# Altium PCB Radar_1GHz.PcbDoc (part 2 of 2)
Units mil, origin at the board's own origin, x right, y up, seen from the top; angles counter-clockwise.
Board outline 4921.26 x 3149.61 mil, 4 copper layers (Top Layer - RF, Layer 1 - GND, Layer 2 - GND, Bottom Layer - PWR), stack 62.633 mil thick; 158 components, 76 nets, 413 pads, 246 vias.
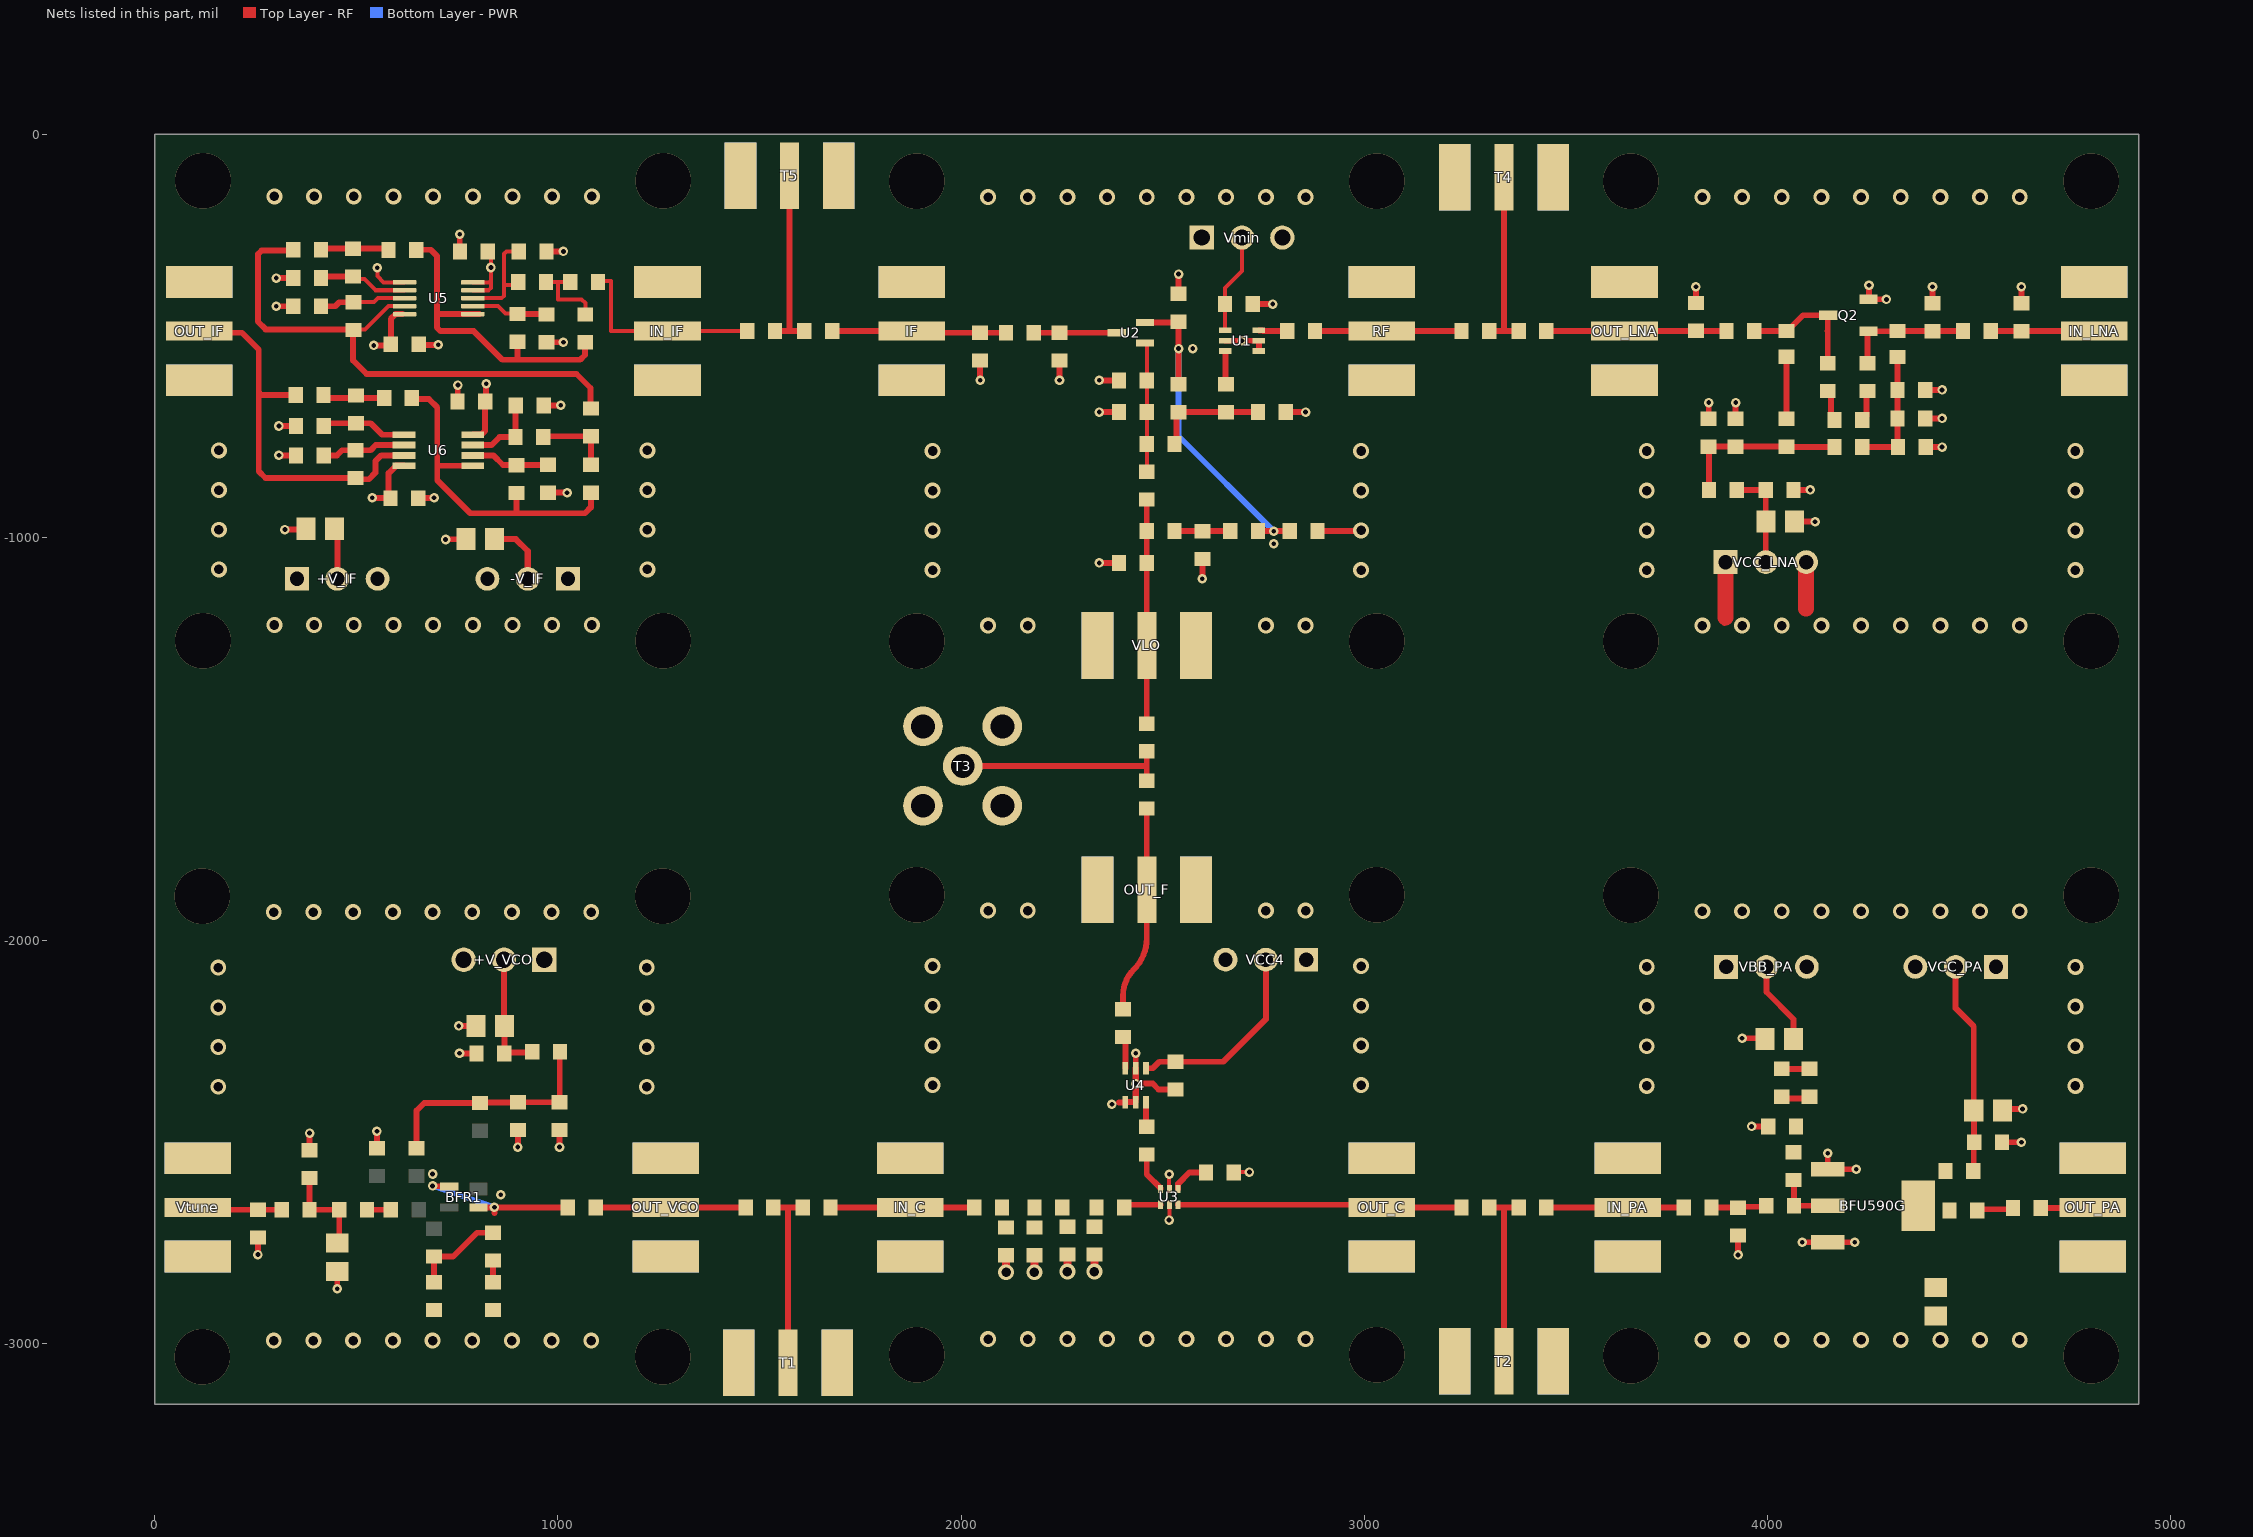
[diagram p4: the nets of this part, all layers, seen from the top]

## Via types
v1: diameter 39.37, hole 23.62, Top Layer - RF to Bottom Layer - PWR, tented both sides, 150 vias
v2: diameter 23.62, hole 11.81, Top Layer - RF to Bottom Layer - PWR, tented both sides, 72 vias
v3: diameter 137.8, hole 137.8, Top Layer - RF to Bottom Layer - PWR, 24 vias

## Nets (pads, with @x,y where several pads share a name; then routed paths per layer and width w, separated by ;. In a path a pad name is that pad's centre, name@x,y a point inside that pad or via, vN(x,y) a via of type N, cw(c..) or ccw(c..) an arc to the next point about the centre after c; other vN are vias at no path point) (continued)
GND: +V_IF.1 +V_IF.3 +V_VCO.01 +V_VCO.03 -V_IF.1 -V_IF.3 BFU590G.1 BFU590G.3 C1.1 C2.2 C3.2 C8.1 C9.1 C10.1 C11.1 C12.1 C13.1 C14.2 C15.1 C19.1 C20.1 C21.2 C22.2 C23.2 C24.2 C25.1 C28.1 C29.2 C30.2 C31.2 C32.2 C33.2 C34.1 C35.1 C40.1 C41.1 C42.1 C46.1 C47.1 C48.1 C51.2 C52.2 C53.1 C54.1 C55.1 C56.1 Cn1.1 Cn2.1 Cp1.1 Cp2.1 D1.1 IF.2 IN_C.2 IN_IF.2 IN_LNA.2 IN_PA.2 L4.2 L6.1 L7.1 L17.1 L18.1 OUT_C.2 OUT_F.2 OUT_IF.2 OUT_LNA.2 OUT_PA.2 OUT_VCO.2 Q2.2 R4.1 R6.1 R9.2 R13.1 R14.1 R16.1 R18.1 R20.1 RF.2 T1.2 T2.2 T3.2 T4.2 T5.2 U1.2 U1.4 U1.5 U3.2 U3.5 U4.2 U4.4 U4.5 VBB_PA.1 VBB_PA.3 VCC4.1 VCC4.3 VCC_LNA.1 VCC_LNA.3 VCC_PA.1 VCC_PA.3 VLO.2 Vmin.01 Vmin.03 Vtune.2 | length 3405.5
  Top Layer - RF w10: v2(2515.75,-2692.91) 2516.65,-2692.01 U3.2@2516.65,-2662.91 ; v2(2516.2,-2579.19) 2516.2,-2615.22 U3.5@2516.65,-2615.67 ; R13.1@2678.82,-2574.35 2714.84,-2574.35 v2(2715.3,-2573.9)
  Top Layer - RF w14.5: v2(255.91,-2778.54) C20.1@255.91,-2736.22 ; v2(301.14,-426.38) R16.1@343.46,-426.38 ; v2(301.14,-356.38) C54.1@343.46,-356.38 ; v2(308.07,-796.26) R20.1@350.39,-796.26 ; v2(308.07,-723.43) C56.1@350.39,-723.43 ; v2(322.83,-980.32) 373.03,-980.32 C51.2@375,-978.35 ; C21.2@383.86,-2519.69 v2(383.86,-2477.36) ; v2(452.76,-2863.19) D1.1@452.76,-2820.87 ; R4.1@551.18,-2514.76 v2(551.18,-2472.44) ; Cp1.1@653.54,-902.56 654.04,-902.07 692.42,-902.07 v2(692.91,-901.57) ; Cn2.1@654.53,-520.67 656,-522.15 v2(703.25,-522.15) ; v2(721.46,-1004.92) 721.95,-1004.43 771.16,-1004.43 C52.2@771.65,-1003.94 ; Cn1.1@750.98,-660.43 Cn1.1@750.98,-662.4 751.48,-661.91 751.48,-622.54 v2(751.97,-622.05) ; v2(753.94,-2211.61) C14.2@796.26,-2211.61 ; v2(755.91,-2279.53) C15.1@798.23,-2279.53 ; v2(756.4,-247.54) 756.64,-247.79 756.64,-289.62 756.4,-289.86 Cp2.1@756.89,-290.35 ; v2(900.59,-2511.81) C13.1@900.59,-2469.49 ; C55.1@964.57,-672.24 v2(1006.89,-672.24) ; R14.1@971.46,-515.75 v2(1013.78,-515.75) ; C53.1@971.46,-290.35 v2(1013.78,-290.35) ; R18.1@975.39,-888.78 v2(1022.64,-888.78) ; v2(1003.94,-2511.81) C12.1@1003.94,-2469.49 ; v2(2047.24,-610.24) C9.1@2047.24,-561.02 ; v2(2244.09,-610.24) C8.1@2244.09,-561.02 ; v2(2342.52,-1062.99) C10.1@2391.73,-1062.99 ; v2(2342.52,-688.98) C2.2@2391.73,-688.98 ; v2(2342.52,-610.24) L4.2@2391.73,-610.24 ; v2(2433.07,-2354.45) 2475.21,-2354.45 2489.85,-2369.09 C48.1@2531.5,-2369.09 ; U4.2@2433.07,-2316.27 v2(2433.07,-2279.53) ; L7.1@2539.37,-395.67 v2(2539.37,-346.46) ; v2(2598.43,-1102.36) L6.1@2598.43,-1053.15 ; U1.2@2654.85,-511.81 v2(2696.85,-511.81) U1.5@2738.85,-511.81 U1.4@2738.85,-537.4 ; C1.1@2723.75,-420.94 v2(2772.96,-420.94) ; C3.2@2805.12,-688.98 v2(2854.33,-688.98) ; C11.1@2883.86,-984.25 2990.16,-984.25 v1(2992.13,-982.28) ; C41.1@3822.83,-418.31 v2(3822.83,-377.95) ; C33.2@3854.33,-705.71 v2(3854.33,-665.35) ; 3893.7,-1212.6 3896.06,-1210.24 ; 3893.7,-1200.79 3896.06,-1198.43 ; C32.2@3921.26,-705.71 v2(3921.26,-665.35) ; v2(3927.17,-2779.53) C28.1@3927.17,-2731.3 ; v2(3937.01,-2242.13) 3992.13,-2242.13 C22.2@3994.09,-2244.09 ; v2(3960.63,-2460.63) C25.1@4001.97,-2460.63 ; C31.2@4064.96,-881.89 v2(4106.3,-881.89) ; C30.2@4066.93,-960.63 v2(4118.11,-960.63) ; v2(4086.61,-2748.03) v2(4216.54,-2748.03) ; 4096.06,-1176.77 4098.43,-1179.13 ; v2(4149.61,-2527.56) BFU590G.1@4149.61,-2566.93 v2(4220.47,-2566.93) ; v2(4251.97,-374.02) 4251.97,-407.64 Q2.2@4250.79,-408.82 4251.1,-409.13 4294.96,-409.13 v2(4295.28,-409.45) ; C35.1@4391.73,-704.72 v2(4433.07,-704.72) ; C34.1@4391.73,-633.86 v2(4433.07,-633.86) ; R9.2@4392.72,-775.59 v2(4433.07,-775.59) ; C40.1@4409.45,-419.29 v2(4409.45,-377.95) ; C24.2@4581.69,-2500 v2(4629.92,-2500) ; C23.2@4581.69,-2422.24 C23.2@4582.68,-2421.26 4586.61,-2417.32 v2(4632.87,-2417.32) ; C42.1@4629.92,-419.29 v2(4629.92,-377.95)
  Top Layer - RF w15.75: 2391.73,-2401.57 2407.48,-2401.57 2408.79,-2400.27 U4.5@2432.2,-2400.27 ; U4.5@2433.07,-2392.64 v2(2433.07,-2354.45) U4.2@2433.07,-2316.27
  Top Layer - RF w19.68: v1(2111.65,-2822.44) C46.1@2111.65,-2780.12 ; v1(2181.65,-2822.44) L17.1@2181.65,-2780.12 ; v1(2263.78,-2820.87) C47.1@2263.78,-2778.54 ; v1(2330.71,-2820.87) L18.1@2330.71,-2778.54
  Top Layer - RF w39.37: 3896.06,-1198.43 VCC_LNA.1@3896.06,-1061.02 ; 4096.06,-1176.77 VCC_LNA.3@4096.06,-1061.02
  other v1: 295.28,-2992.13 393.7,-2992.13 492.13,-2992.13 590.55,-2992.13 688.98,-2992.13 787.4,-2992.13 885.83,-2992.13 984.25,-2992.13 1082.68,-2992.13 3838.58,-2990.16 3937.01,-2990.16 4035.43,-2990.16 4133.86,-2990.16 4232.28,-2990.16 4330.71,-2990.16 4429.13,-2990.16 4527.56,-2990.16 4625.98,-2990.16 2066.93,-2988.19 2165.35,-2988.19 2263.78,-2988.19 2362.2,-2988.19 2460.63,-2988.19 2559.06,-2988.19 2657.48,-2988.19 2755.91,-2988.19 2854.33,-2988.19 157.48,-2362.2 1220.47,-2362.2 3700.79,-2360.24 4763.78,-2360.24 1929.13,-2358.27 2992.13,-2358.27 157.48,-2263.78 1220.47,-2263.78 3700.79,-2261.81 4763.78,-2261.81 1929.13,-2259.84 2992.13,-2259.84 157.48,-2165.35 1220.47,-2165.35 3700.79,-2163.39 4763.78,-2163.39 1929.13,-2161.42 2992.13,-2161.42 157.48,-2066.93 1220.47,-2066.93 3700.79,-2064.96 4763.78,-2064.96 1929.13,-2062.99 2992.13,-2062.99 295.28,-1929.13 393.7,-1929.13 492.13,-1929.13 590.55,-1929.13 688.98,-1929.13 787.4,-1929.13 885.83,-1929.13 984.25,-1929.13 1082.68,-1929.13 3838.58,-1927.17 3937.01,-1927.17 4035.43,-1927.17 4133.86,-1927.17 4232.28,-1927.17 4330.71,-1927.17 4429.13,-1927.17 4527.56,-1927.17 4625.98,-1927.17 2066.93,-1925.2 2165.35,-1925.2 2755.91,-1925.2 2854.33,-1925.2 2066.93,-1218.5 2165.35,-1218.5 2755.91,-1218.5 2854.33,-1218.5 3838.58,-1218.5 3937.01,-1218.5 4035.43,-1218.5 4133.86,-1218.5 4232.28,-1218.5 4330.71,-1218.5 4429.13,-1218.5 4527.56,-1218.5 4625.98,-1218.5 296.79,-1216.99 395.22,-1216.99 493.64,-1216.99 592.07,-1216.99 690.49,-1216.99 788.92,-1216.99 887.34,-1216.99 985.77,-1216.99 1084.2,-1216.99 1929.13,-1080.71 2992.13,-1080.71 3700.79,-1080.71 4763.78,-1080.71 159,-1079.2 1221.99,-1079.2 1929.13,-982.28 3700.79,-982.28 4763.78,-982.28 159,-980.77 1221.99,-980.77 1929.13,-883.86 2992.13,-883.86 3700.79,-883.86 4763.78,-883.86 159,-882.34 1221.99,-882.34 1929.13,-785.43 2992.13,-785.43 3700.79,-785.43 4763.78,-785.43 159,-783.92 1221.99,-783.92 2066.93,-155.51 2165.35,-155.51 2263.78,-155.51 2362.2,-155.51 2460.63,-155.51 2559.06,-155.51 2657.48,-155.51 2755.91,-155.51 2854.33,-155.51 3838.58,-155.51 3937.01,-155.51 4035.43,-155.51 4133.86,-155.51 4232.28,-155.51 4330.71,-155.51 4429.13,-155.51 4527.56,-155.51 4625.98,-155.51 296.79,-154 395.22,-154 493.64,-154 592.07,-154 690.49,-154 788.92,-154 887.34,-154 985.77,-154 1084.2,-154
  other v2: 858.27,-2629.92 688.98,-2578.74 2374.02,-2405.51 2775.59,-1015.75 2574.8,-531.5
  other v3: 118.11,-3031.5 1259.84,-3031.5 3661.42,-3029.53 4803.15,-3029.53 1889.76,-3027.56 3031.5,-3027.56 118.11,-1889.76 1259.84,-1889.76 3661.42,-1887.8 4803.15,-1887.8 1889.76,-1885.83 3031.5,-1885.83 1889.76,-1257.87 3031.5,-1257.87 3661.42,-1257.87 4803.15,-1257.87 119.63,-1256.36 1261.36,-1256.36 1889.76,-116.14 3031.5,-116.14 3661.42,-116.14 4803.15,-116.14 119.63,-114.63 1261.36,-114.63
Net+V_VCO_02: +V_VCO.02 C14.1 C15.2 R1.1 | length 303.2
  Top Layer - RF w14.5: +V_VCO.02@866.14,-2047.24 866.14,-2210.63 C14.1@867.13,-2211.61 C15.2@867.13,-2279.53 869.09,-2277.56 934.06,-2277.56 R1.1@936.02,-2275.59
NetBFR1_1: BFR1.1 BFR1.3 C17.1 C18.2 C19.2 L9.2 | length 685.1
  Top Layer - RF w14.5: v2(688.98,-2608.27) 689.96,-2609.25 729.33,-2609.25 BFR1.3@730.32,-2610.24 ; C19.2@692.91,-2847.44 C17.1@692.91,-2783.46 740.16,-2783.46 799.21,-2724.41 L9.2@838.58,-2724.41 ; BFR1.1@803.15,-2661.42 v2(842.52,-2661.42) ; 842.52,-2675.2 v2(842.52,-2661.42) ; C18.2@1016.73,-2653.54 C18.2@1024.61,-2661.42 v2(842.52,-2661.42)
  Bottom Layer - PWR w14.5: v2(688.98,-2608.27) v2(842.52,-2661.42)
NetBFU590G_2: BFU590G.2 L12.1 L14.2 | length 146.7
  Top Layer - RF w14.5: L12.1@4065.94,-2594.49 L14.2@4065.94,-2657.48 BFU590G.2@4149.61,-2657.48
NetBFU590G_4: BFU590G.4 C29.1 L11.1 L13.1
NetC1_2: C1.2 U1.1 Vmin.02 | length 247.7
  Top Layer - RF w10: U1.1@2654.85,-486.22 C1.2@2654.85,-420.94 2654.85,-380.58 2696.85,-338.58 Vmin.02@2696.85,-255.91
NetC3_1: C3.1 C5.2 L1.2 L3.2 | length 279.7
  Top Layer - RF w14.5: L1.2@2529.53,-767.72 2534.45,-762.8 2534.45,-693.9 L3.2@2539.37,-688.98 C5.2@2657.48,-688.98 C3.1@2736.22,-688.98
NetC4_1: C4.1 R32.1 RF.1 | length 363.2
  Top Layer - RF w14.5: C4.1@2877.95,-488.19 RF.1@3043.31,-488.19 R32.1@3241.14,-488.19
NetC4_2: C4.2 U1.6 | length 71
  Top Layer - RF w14.5: U1.6@2738.85,-486.22 2746.85,-486.22 2748.82,-488.19 C4.2@2809.06,-488.19
NetC5_1: C5.1 U1.3 | length 84.4
  Top Layer - RF w14.5: U1.3@2654.85,-537.4 2655.92,-537.4 2656.17,-537.65 2656.17,-618.76 C5.1@2657.48,-620.08
NetC6_1: C6.1 C10.2 L2.1 R34.2 VLO.1 | length 556.1
  Top Layer - RF w14.5: R34.2@2460.63,-1461.61 VLO.1@2460.63,-1267.72 C10.2@2460.63,-1062.99 C6.1@2460.63,-984.25 L2.1@2460.63,-905.51
NetC6_2: C6.2 C7.1 L6.2 | length 137.8
  Top Layer - RF w14.5: C6.2@2529.53,-984.25 L6.2@2598.43,-984.25 C7.1@2667.32,-984.25
NetC8_2: C8.2 L5.1 U2.3 | length 206.1
  Top Layer - RF w14.5: L5.1@2180.12,-492.13 C8.2@2244.09,-492.13 U2.3@2386.26,-492.13
NetC9_2: C9.2 IF.1 L5.2 R31.2 | length 432.7
  Top Layer - RF w14.5: R31.2@1680.12,-488.19 IF.1@1877.95,-488.19 1881.89,-492.13 C9.2@2047.24,-492.13 L5.2@2111.22,-492.13
NetC12_2: C12.2 C13.2 R1.2 R2.2 R3.2 | length 581.8
  Top Layer - RF w14.5: R3.2@649.61,-2514.76 649.61,-2421.26 668.31,-2402.56 R2.2@807.09,-2402.56 808.07,-2401.57 899.61,-2401.57 C13.2@900.59,-2400.59 C12.2@1003.94,-2400.59 1004.43,-2400.1 1004.43,-2276.08 R1.2@1004.92,-2275.59
NetC16_2: C16.2 L8.2 | length 59.1
  Top Layer - RF w14.5: L8.2@526.57,-2667.32 C16.2@585.63,-2667.32
NetC18_1: C18.1 OUT_VCO.1 R36.1 | length 372
  Top Layer - RF w14.5: C18.1@1093.5,-2661.42 OUT_VCO.1@1267.72,-2661.42 R36.1@1465.55,-2661.42
NetC20_2: C20.2 R5.2 Vtune.1 | length 211.1
  Top Layer - RF w14.5: Vtune.1@106.3,-2661.42 112.2,-2667.32 C20.2@255.91,-2667.32 R5.2@314.96,-2667.32
NetC21_1: C21.1 D1.2 L8.1 R5.1 | length 237.3
  Top Layer - RF w14.5: C21.1@383.86,-2588.58 R5.1@383.86,-2667.32 L8.1@457.68,-2667.32 457.68,-2745.08 D1.2@452.76,-2750
NetC22_1: C22.1 L10.2 R7.2 VBB_PA.2 | length 289.8
  Top Layer - RF w14.5: VBB_PA.2@3997.64,-2064.96 3997.64,-2127.56 4064.96,-2194.88 C22.1@4064.96,-2244.09 ; L10.2@4035.43,-2317.91 R7.2@4104.33,-2317.91 R7.2@4094.49,-2308.07
NetC23_1: C23.1 C24.1 L11.2 VCC_PA.2 | length 525.7
  Top Layer - RF w14.5: VCC_PA.2@4466.93,-2064.96 4466.93,-2167.72 4511.81,-2212.6 C23.1@4511.81,-2421.26 4512.8,-2422.24 C24.1@4512.8,-2500 4511.81,-2500.98 4511.81,-2569.88 L11.2@4510.83,-2570.87
NetC25_2: C25.2 L10.1 L12.2 R7.1 | length 51.3
  Top Layer - RF w14.5: L10.1@4035.43,-2386.81 4040.35,-2391.73 4084.65,-2391.73
NetC26_1: C26.1 L13.2 | length 91
  Top Layer - RF w14.5: L13.2@4520.67,-2669.29 4523.62,-2666.34 4606.3,-2666.34 C26.1@4609.25,-2663.39
NetC26_2: C26.2 OUT_PA.1 | length 129.8
  Top Layer - RF w14.5: C26.2@4678.15,-2663.39 4805.12,-2663.39 OUT_PA.1@4807.09,-2661.42
NetC27_1: C27.1 IN_PA.1 R39.2 | length 340.6
  Top Layer - RF w14.5: R39.2@3451.77,-2661.42 IN_PA.1@3653.54,-2661.42 C27.1@3792.32,-2661.42
NetC27_2: C27.2 C28.2 L14.1 | length 138.3
  Top Layer - RF w14.5: C27.2@3861.22,-2661.42 3861.71,-2661.91 3926.67,-2661.91 C28.2@3927.17,-2662.4 3929.63,-2659.94 3994.59,-2659.94 L14.1@3997.05,-2657.48
NetC30_1: C30.1 C31.1 R8.2 VCC_LNA.2 | length 251
  Top Layer - RF w14.5: R8.2@3924.21,-881.89 C31.1@3996.06,-881.89 C30.1@3996.06,-960.63 VCC_LNA.2@3996.06,-1061.02
NetC32_1: C32.1 C33.1 R8.1 R10.2 R11.2 | length 420.1
  Top Layer - RF w14.5: R8.1@3855.32,-881.89 3854.82,-881.4 3854.82,-775.1 C33.1@3854.33,-774.61 C32.1@3921.26,-774.61 R11.2@4047.24,-774.61 4047.74,-775.1 4165.85,-775.1 R10.2@4166.34,-775.59
NetC34_2: C34.2 C35.2 L16.2 R9.1 R10.1 | length 312.3
  Top Layer - RF w14.5: R10.1@4235.24,-775.59 R9.1@4323.82,-775.59 4322.83,-774.61 C35.2@4322.83,-704.72 C34.2@4322.83,-633.86 L16.2@4322.83,-552.28
NetC36_1: C36.1 C37.1 L15.1 Q2.3 | length 309.2
  Top Layer - RF w14.5: C37.1@3967.52,-488.19 3967.8,-487.91 4046.97,-487.91 L15.1@4047.24,-487.64 4049.8,-487.64 4060.07,-477.37 4060.07,-476.88 4088.13,-448.82 Q2.3@4150.79,-448.82 ; Q2.3@4148.03,-452.13 4149.61,-453.7 4149.61,-488.19 ; 4149.06,-487.64 4149.61,-488.19 ; C36.1@4149.61,-560.04 4149.61,-488.19
NetC36_2: C36.2 R12.2 | length 86.7
  Top Layer - RF w14.5: C36.2@4149.61,-628.94 4157.48,-636.81 4157.48,-699.8 R12.2@4166.34,-708.66
NetC37_2: C37.2 C41.2 OUT_LNA.1 R33.2 | length 446.9
  Top Layer - RF w14.5: R33.2@3451.77,-488.19 OUT_LNA.1@3645.67,-488.19 C37.2@3898.62,-488.19
NetC38_1: C38.1 C39.2 C40.2 L16.1 Q2.1 | length 315.4
  Top Layer - RF w14.5: C38.1@4248.03,-567.91 4248.03,-491.57 Q2.1@4250.79,-488.82 4251.1,-488.5 4322.52,-488.5 L16.1@4322.83,-488.19 C40.2@4409.45,-488.19 C39.2@4485.24,-488.19 C39.2@4484.92,-488.5
NetC38_2: C38.2 R12.1 | length 77.2
  Top Layer - RF w14.5: R12.1@4235.24,-708.66 4245.7,-698.2 4245.7,-639.14 C38.2@4248.03,-636.81
NetC39_1: C39.1 C42.2 IN_LNA.1 | length 256.9
  Top Layer - RF w14.5: C39.1@4554.13,-488.19 C42.2@4629.92,-488.19 IN_LNA.1@4811.02,-488.19
NetC43_1: C43.1 IN_C.1 R37.2 | length 356.3
  Top Layer - RF w14.5: R37.2@1676.18,-2661.42 IN_C.1@1874.02,-2661.42 C43.1@2032.48,-2661.42
NetC43_2: C43.2 C44.1 C46.2 L17.2
NetC44_2: C44.2 C45.1 C47.2 L18.2
NetC45_2: C45.2 U3.1 | length 93.1
  Top Layer - RF w14.5: C45.2@2404.53,-2661.42 2410.91,-2655.04 U3.1@2495,-2655.04
NetC48_2: C48.2 U4.1 VCC4.2 | length 495.2
  Top Layer - RF w14.5: U4.1@2458.66,-2316.27 2475.66,-2316.27 2491.73,-2300.2 C48.2@2531.5,-2300.2 2650.59,-2300.2 2755.91,-2194.88 VCC4.2@2755.91,-2047.24
NetC49_1: C49.1 U3.6 | length 99.4
  Top Layer - RF w14.5: C49.1@2460.63,-2530.51 2460.63,-2579.8 2495,-2614.17 U3.6@2495,-2615.67
NetC49_2: C49.2 U4.6 | length 62.2
  Top Layer - RF w14.5: U4.6@2458.66,-2400.27 2458.91,-2400.52 2458.91,-2459.9 C49.2@2460.63,-2461.61
NetC50_1: C50.1 U4.3 | length 78.6
  Top Layer - RF w14.5: C50.1@2401.57,-2239.17 2407.48,-2249.64 U4.3@2407.48,-2316.27
NetC50_2: C50.2 OUT_F.1 R35.1 | length 513.8
  Top Layer - RF w14.5: C50.2@2401.57,-2170.28 2401.57,-2159.81 2401.57,-2136.36 cw(c2493.36,-2136.44) 2428.45,-2071.55 ccw(c2350.91,-1993.92) 2460.63,-1993.92 2460.63,-1993.85 OUT_F.1@2460.63,-1874.02 R35.1@2460.63,-1672.24
NetC53_2: C53.2 R23.2 U5.3 | length 261.2
  Top Layer - RF w10: U5.3@788.98,-406.38 860.28,-406.38 866.14,-400.52 866.14,-373.43 ; R23.2@901.57,-366.14 894.29,-373.43 866.14,-373.43 ; C53.2@902.56,-290.35 872,-290.35 866.14,-296.21 866.14,-373.43
NetC54_2: C54.2 R25.2 U5.7 | length 223.2
  Top Layer - RF w10: R25.2@492.13,-352.36 498.03,-358.27 519.69,-358.27 548.11,-386.69 U5.7@619.69,-386.69
  Top Layer - RF w14.5: C54.2@412.36,-356.38 416.38,-352.36 R25.2@492.13,-352.36
NetC55_2: C55.2 R27.2 U6.3 | length 192.7
  Top Layer - RF w14.5: U6.3@789.24,-770.67 835.63,-770.67 855.32,-750.98 R27.2@894.69,-750.98 894.69,-673.23 C55.2@895.67,-672.24
NetC56_2: C56.2 R29.2 U6.5 | length 213.6
  Top Layer - RF w14.5: C56.2@419.29,-723.43 426.18,-716.54 R29.2@499.02,-716.54 535.43,-716.54 563.98,-745.08 U6.5@618.24,-745.08
NetC57_1: C57.1 R15.2 R24.1 U5.1 | length 823.5
  Top Layer - RF w14.5: R24.1@648.62,-286.42 684.68,-286.38 699.69,-301.38 699.69,-444.88 ; U5.1@805.24,-446.26 804.72,-445.75 U5.1@788.98,-445.75 700.55,-445.75 699.69,-444.88 ; R15.2@899.61,-514.76 899.61,-557.09 901.57,-559.06 ; C57.1@1067.91,-515.75 1066.93,-516.73 1066.93,-547.24 1055.12,-559.06 901.57,-559.06 ; 699.69,-444.88 699.69,-479.21 708.66,-488.19 791.34,-488.19 862.2,-559.06 901.57,-559.06
NetC57_2: C57.2 R22.2 R23.1 | length 203.5
  Top Layer - RF w10: R23.1@970.47,-366.14 1000,-366.14 ; R22.2@1030.51,-366.14 1000,-366.14 ; C57.2@1067.91,-446.85 1067.91,-418.31 1059.06,-409.45 1000,-409.45 1000,-366.14
NetC58_1: C58.1 R17.2 R26.1 U5.9 | length 1379.6
  Top Layer - RF w10: R17.2@493.11,-485.24 494.26,-484.09 521.94,-484.09 579.96,-426.06 U5.9@619.69,-426.06
  Top Layer - RF w14.5: 323.78,-287.97 265.13,-287.97 255.91,-297.2 255.91,-464.57 275.1,-483.76 491.63,-483.76 491.63,-560.53 525.59,-594.49 1046.26,-594.49 1080.71,-628.94 1080.71,-679.13 R26.1@1081.69,-680.12
NetC58_2: C58.2 R24.2 R25.1 | length 169.8
  Top Layer - RF w14.5: C58.2@412.36,-286.38 415.28,-283.46 576.77,-283.46 R24.2@579.72,-286.42
NetC59_1: C59.1 R19.2 R28.1 U6.1 | length 866.7
  Top Layer - RF w14.5: R28.1@641.73,-656.26 679.88,-656.26 700.79,-677.17 700.79,-818.9 ; U6.1@809.67,-822.48 789.87,-822.48 U6.1@789.24,-821.85 703.74,-821.85 700.79,-818.9 ; R19.2@897.64,-889.76 897.64,-939.96 ; C59.1@1081.69,-888.78 1081.69,-925.2 1066.93,-939.96 897.64,-939.96 ; 700.79,-818.9 700.79,-858.27 782.48,-939.96 897.64,-939.96
NetC59_2: C59.2 R26.2 R27.1 | length 189.8
  Top Layer - RF w14.5: R27.1@963.58,-750.98 965.55,-749.02 R26.2@1081.69,-749.02 C59.2@1081.69,-819.88
NetC60_1: C60.1 OUT_IF.1 R21.2 U6.7 | length 960.4
  Top Layer - RF w14.5: OUT_IF.1@122.05,-486.22 127.95,-492.13 216.54,-492.13 257.87,-533.46 257.87,-639.76 ; C60.1@349.41,-646.65 264.76,-646.65 257.87,-639.76 ; R21.2@482.28,-855.31 531.5,-855.31 547.24,-839.57 547.24,-811.02 562.01,-796.26 U6.7@618.24,-796.26 ; R21.2@482.28,-852.36 274.61,-852.36 257.87,-835.63 257.87,-646.65 257.87,-639.76
NetC60_2: C60.2 R28.2 R29.1 | length 159.4
  Top Layer - RF w14.5: C60.2@409.45,-653.54 R28.2@568.9,-653.54
NetIN_IF_1: IN_IF.1 R22.1 R30.1 | length 494.2
  Top Layer - RF w10: R22.1@1099.41,-366.14 1112.13,-364.17 1131.89,-364.17 1131.89,-488.19 IN_IF.1@1271.65,-488.19 R30.1@1469.49,-488.19
NetL9_1: L9.1 R6.2 | length 54.1
  Top Layer - RF w14.5: R6.2@838.58,-2847.44 L9.1@838.58,-2793.31
NetL15_2: L15.2 R11.1 | length 154
  Top Layer - RF w14.5: R11.1@4047.24,-705.71 L15.2@4047.24,-551.73
NetOUT_C_1: OUT_C.1 R38.1 U3.3 | length 705.5
  Top Layer - RF w14.5: U3.3@2538.31,-2655.04 3036.93,-2655.04 OUT_C.1@3043.31,-2661.42 R38.1@3241.14,-2661.42
NetR13_2: R13.2 U3.4 | length 93.5
  Top Layer - RF w14.5: U3.4@2538.31,-2615.67 2538.31,-2602.77 2566.28,-2574.8 R13.2@2607.28,-2574.8
NetR14_2: R14.2 R15.1 U5.2 | length 191.1
  Top Layer - RF w10: U5.2@788.98,-426.06 851.26,-426.06 870.08,-444.88 898.62,-444.88 R15.1@899.61,-445.87
  Top Layer - RF w14.5: R15.1@899.61,-445.87 970.47,-445.87 R14.2@971.46,-446.85
NetR16_2: R16.2 R17.1 U5.8 | length 215.6
  Top Layer - RF w10: R17.1@493.11,-416.34 544.29,-416.34 554.25,-406.38 U5.8@619.69,-406.38
  Top Layer - RF w14.5: R16.2@412.36,-426.38 447.64,-426.38 457.68,-416.34 R17.1@493.11,-416.34
NetR18_2: R18.2 R19.1 U6.2 | length 196.8
  Top Layer - RF w14.5: U6.2@789.24,-796.26 839.57,-796.26 863.56,-820.25 897.02,-820.25 R19.1@897.64,-820.87 898.62,-819.88 R18.2@975.39,-819.88
NetR20_2: R20.2 R21.1 U6.6 | length 209.5
  Top Layer - RF w14.5: R20.2@419.29,-796.26 451.77,-796.26 464.57,-783.46 R21.1@498.03,-783.46 535.43,-783.46 548.23,-770.67 U6.6@618.24,-770.67
NetR30_2: R30.2 R31.1 T5.1 | length 458.7
  Top Layer - RF w14.5: R30.2@1538.39,-488.19 1574.8,-488.19 ; T5.1@1574.8,-102.36 1574.8,-488.19 ; R31.1@1611.22,-488.19 1574.8,-488.19
NetR32_2: R32.2 R33.1 T4.1 | length 454.7
  Top Layer - RF w14.5: R32.2@3310.04,-488.19 3346.46,-488.19 ; T4.1@3346.46,-106.3 3346.46,-488.19 ; R33.1@3382.87,-488.19 3346.46,-488.19
NetR34_1: R34.1 R35.2 T3.1 | length 529.5
  Top Layer - RF w14.5: T3.1@2003.94,-1566.93 2460.63,-1566.93 ; R35.2@2460.63,-1603.35 2460.63,-1566.93 ; R34.1@2460.63,-1530.51 2460.63,-1566.93
NetR36_2: R36.2 R37.1 T1.1 | length 458.7
  Top Layer - RF w14.5: R36.2@1534.45,-2661.42 1570.87,-2661.42 ; T1.1@1570.87,-3047.24 1570.87,-2661.42 ; R37.1@1607.28,-2661.42 1570.87,-2661.42
NetR38_2: R38.2 R39.1 T2.1 | length 454.7
  Top Layer - RF w14.5: R38.2@3310.04,-2661.42 3346.46,-2661.42 ; T2.1@3346.46,-3043.31 3346.46,-2661.42 ; R39.1@3382.87,-2661.42 3346.46,-2661.42
p3: C2.1 L1.1 L2.2 L4.1 U2.1 | length 320.9
  Top Layer - RF w10: U2.1@2456.26,-517.72 2456.63,-517.72 2460.63,-521.72 L4.1@2460.63,-610.24 C2.1@2460.63,-688.98 L1.1@2460.63,-767.72 L2.2@2460.63,-836.61
p4: C7.2 C11.2 L3.1 L7.2 U2.2 | length 868.8
  Top Layer - RF w14.5: U2.2@2456.26,-466.54 2537.4,-466.54 L7.2@2539.37,-464.57 v2(2539.37,-531.5) L3.1@2539.37,-620.08 ; C7.2@2736.22,-984.25 v2(2775.59,-984.25) C11.2@2814.96,-984.25
  Bottom Layer - PWR w14.5: v2(2539.37,-531.5) 2539.37,-748.03 v2(2775.59,-984.25)
V+: +V_IF.2 C51.1 Cp1.2 Cp2.2 U5.4 U5.5 U5.6 U6.8 | length 556.3
  Top Layer - RF w10: v2(552.17,-330.71) 552.17,-351.38 567.8,-367.01 U5.6@619.69,-367.01 ; U5.4@788.98,-386.69 827.92,-386.69 833.78,-380.83 833.78,-362.2 ; U5.5@788.98,-367.01 828.98,-367.01 833.78,-362.2 ; Cp2.2@825.79,-290.35 833.78,-298.35 833.78,-362.2
  Top Layer - RF w15: C51.1@445.87,-978.35 453.74,-986.22 453.74,-1101.38 +V_IF.2@452.76,-1102.36 ; v2(539.37,-901.57) 539.86,-902.07 576.33,-902.07 580.24,-898.15 580.24,-840.35 598.74,-821.85 U6.8@618.24,-821.85
  other v2: 833.78,-330.28
V-: -V_IF.2 C52.1 Cn1.2 Cn2.2 U5.10 U6.4 | length 461.3
  Top Layer - RF w10: Cn2.2@582.68,-523.62 Cn2.2@585.63,-520.67 ; U5.10@597.13,-446.26 U5.10@597.64,-445.75 ; U5.10@614.17,-445.75 U5.10@619.69,-445.75
  Top Layer - RF w15: v2(543.31,-523.62) Cn2.2@582.68,-523.62 ; Cn2.2@585.63,-520.67 585.63,-457.76 U5.10@597.13,-446.26 ; U5.10@597.64,-445.75 U5.10@614.17,-445.75 ; U6.4@789.24,-745.08 790.24,-744.08 810.87,-744.08 819.66,-735.29 Cn1.2@819.66,-662.62 ; Cn1.2@819.88,-662.4 821.14,-661.14 821.14,-619.81 v2(822.4,-618.55) ; C52.1@842.52,-1003.94 895.67,-1003.94 925.2,-1033.46 -V_IF.2@925.2,-1102.36

## Polygon pours and split planes (outlines as drawn)
GND on Bottom Layer - PWR "GND_L04_P018" (solid, pour order 18): 1790.94,-3126.38 1790.94,-1787.8 3129.53,-1787.8 3129.53,-3126.38
GND on Bottom Layer - PWR "GND_L04_P004" (solid, pour order 4): 19.69,-3129.92 19.69,-1791.34 1358.27,-1791.34 1358.27,-3129.92
GND on Bottom Layer - PWR "GND_L04_P003" (solid, pour order 3): 3130.32,-17.32 3130.32,-1355.91 1791.73,-1355.91 1791.73,-17.32
GND on Bottom Layer - PWR "GND_L04_P019" (solid, pour order 19): 1362.2,-14.76 1362.2,-1353.35 23.62,-1353.35 23.62,-14.76
V+ on Bottom Layer - PWR "V+_sallen" (solid, pour order 0): 403.54,-1141.73 501.97,-1141.73 501.97,-1053.15 551.18,-1003.94 551.18,-669.29 495.57,-613.68 495.57,-348.92 507.01,-337.48 905.51,-337.48 905.51,-206.69 885.83,-187.01 452.76,-187.01 403.54,-248.52
V- on Bottom Layer - PWR "V-_sallen" (solid, pour order 1): 561.61,-669.29 841.34,-669.29 872.44,-700.39 872.44,-1141.73 974.41,-1141.73 974.41,-620.08 856.3,-501.97 511.81,-501.97 501.97,-511.81 501.97,-609.65
GND on Bottom Layer - PWR "NONET_L-01_P-001" (solid, pour order 22): 4901.58,-1344.49 3574.8,-1344.49 3574.8,-19.69 3110.24,-19.69 3110.24,-1348.43 2342.52,-1348.43 2342.52,-1805.12 3118.11,-1805.12 3118.11,-3125.98 3574.8,-3125.98 3574.8,-1809.06 4901.58,-1809.06
GND on Bottom Layer - PWR "NONET_L-01_P-001" (solid, pour order 21): 19.69,-1803.15 1346.46,-1803.15 1346.46,-3125.98 1811.02,-3125.98 1811.02,-1799.21 2574.8,-1799.21 2574.8,-1342.52 1803.15,-1342.52 1803.15,-15.75 1346.46,-15.75 1346.46,-1338.58 19.69,-1338.58
GND on Bottom Layer - PWR "GND_L04_P006" (solid, pour order 6): 4901.57,-17.72 4901.57,-1356.3 3562.99,-1356.3 3562.99,-17.72
GND on Bottom Layer - PWR "GND_L04_P005" (solid, pour order 5): 3562.99,-3127.95 3562.99,-1789.37 4901.58,-1789.37 4901.58,-3127.95
GND on Top Layer - RF "NONET_L-01_P-001" (solid, pour order 8): 2322.83,-1653.54 2027.56,-1653.54 2027.56,-1486.22 2322.83,-1486.22 2322.83,-1342.52 1803.15,-1342.52 1803.15,-625.98 1346.46,-625.98 1346.46,-1338.58 19.69,-1338.58 19.69,-1803.15 1346.46,-1803.15 1346.46,-2527.56 1811.02,-2527.56 1811.02,-1799.21 2322.83,-1799.21
GND on Top Layer - RF "NONET_L-01_P-001" (solid, pour order 11): 4901.58,-1344.49 3574.8,-1344.49 3574.8,-620.08 3110.24,-620.08 3110.24,-1348.43 2590.55,-1348.43 2590.55,-1805.12 3118.11,-1805.12 3118.11,-2521.65 3574.8,-2521.65 3574.8,-1809.06 4901.58,-1809.06
GND on Layer 2 - GND (split plane): 4901.16,-3129.51 20.1,-3129.51 20.1,-20.1 4901.16,-20.1
GND on Layer 1 - GND (split plane): 4901.16,-3129.51 20.1,-3129.51 20.1,-20.1 4901.16,-20.1

## Other copper
Top Layer - RF:
  region net GND: 3129.92,-2793.31 1791.34,-2793.31 1791.34,-3125.98 3129.92,-3125.98
  region net GND: 4901.58,-610.24 4696.85,-610.24 4696.85,-1356.3 4901.58,-1356.3
  rectangle net NetC22_1: 4054.8,-2322.83 4084.33,-2224.09
  rectangle net NetC25_2: 4055.12,-2529.53 4084.65,-2391.73
  rectangle net NetBFU590G_4: 4360.24,-2856.3 4466.54,-2551.18
  region net GND: 4079.92,-1914.37 4079.92,-2067.91 4119.29,-2067.91 4119.29,-1914.37
  region net GND: 2433.07,-2377.95 2350.39,-2377.95 2350.39,-2425.2 2433.07,-2425.2
  rectangle net NetBFR1_1: 826.77,-2708.66 858.27,-2649.61
  rectangle net GND: 3562.99,-214.57 4901.57,-17.72
  region net GND: 4549.21,-1926.18 4549.21,-2079.72 4588.58,-2079.72 4588.58,-1926.18
  region net GND: 4348.43,-1914.37 4348.43,-2067.91 4387.8,-2067.91 4387.8,-1914.37
  region net GND: 3879.92,-1914.37 3879.92,-2067.91 3919.29,-2067.91 3919.29,-1914.37
  region net GND: 3574.8,-2960.63 3468.5,-2960.63 3468.5,-3125.98 3574.8,-3125.98
  rectangle net GND: 3118.11,-3125.98 3224.41,-2960.63
  region net GND: 3566.93,-23.62 3460.63,-23.62 3460.63,-188.98 3566.93,-188.98
  rectangle net GND: 3118.11,-188.98 3224.41,-23.62
  region net GND: 1803.15,-19.69 1696.85,-19.69 1696.85,-185.04 1803.15,-185.04
  rectangle net GND: 1346.46,-185.04 1452.76,-19.69
  region net GND: 1799.21,-2964.57 1692.91,-2964.57 1692.91,-3129.92 1799.21,-3129.92
  rectangle net GND: 1342.52,-3129.92 1448.82,-2964.57
  region net GND: 3129.92,-610.24 2928.15,-610.24 2928.15,-1356.3 3129.92,-1356.3
  region net GND: 3129.92,-1159.45 2586.61,-1159.45 2586.61,-1356.3 3129.92,-1356.3
  rectangle net GND: 1791.34,-366.14 1996.06,-17.72
  rectangle net GND: 2928.15,-366.14 3129.92,-17.72
  rectangle net GND: 1794.29,-201.77 3129.92,-17.72
  region net GND: 2329.53,-1159.45 1791.34,-1159.45 1791.34,-1356.3 2329.53,-1356.3
  region net GND: 1993.11,-610.24 1791.34,-610.24 1791.34,-1356.3 1993.11,-1356.3
  rectangle net GND: 3562.99,-366.14 3766.73,-17.72
  rectangle net GND: 4693.9,-366.14 4901.58,-17.72
  region net GND: 4901.58,-1159.45 3562.99,-1159.45 3562.99,-1356.3 4901.58,-1356.3
  region net GND: 3760.83,-610.24 3562.99,-610.24 3562.99,-1356.3 3760.83,-1356.3
  region net GND: 1359.79,-1157.94 21.2,-1157.94 21.2,-1354.79 1359.79,-1354.79
  region net GND: 1359.79,-610.24 1156.5,-610.24 1156.5,-1354.79 1359.79,-1354.79
  rectangle net GND: 21.2,-204.72 1359.79,-16.2
  rectangle net GND: 1157.48,-366.14 1359.79,-16.2
  rectangle net GND: 21.2,-377.95 222.44,-16.2
  region net GND: 222.44,-622.05 21.2,-622.05 21.2,-1354.79 222.44,-1354.79
  rectangle net GND: 4702.76,-2539.37 4901.58,-1789.37
  rectangle net GND: 3562.99,-1986.22 4901.58,-1789.37
  region net GND: 3759.84,-2783.46 3562.99,-2783.46 3562.99,-3127.95 3759.84,-3127.95
  rectangle net GND: 3562.99,-2539.37 3759.84,-1789.37
  region net GND: 4901.58,-2931.1 3562.99,-2931.1 3562.99,-3127.95 4901.58,-3127.95
  region net GND: 4901.58,-2787.4 4702.76,-2787.4 4702.76,-3127.95 4901.58,-3127.95
  region net GND: 3129.92,-2771.65 2933.07,-2771.65 2933.07,-3125.98 3129.92,-3125.98
  region net GND: 1988.19,-2771.65 1791.34,-2771.65 1791.34,-3125.98 1988.19,-3125.98
  rectangle net GND: 1791.34,-1984.25 2346.46,-1787.4
  rectangle net GND: 2922.24,-2543.31 3129.92,-1787.4
  rectangle net GND: 1791.34,-2527.56 1995.08,-1787.4
  region net GND: 3129.92,-1787.4 2582.68,-1787.4 2582.68,-1984.25 3129.92,-1984.25
  rectangle net NetC43_2: 2090.55,-2724.41 2200.79,-2641.73
  rectangle net NetC44_2: 2240.28,-2721.54 2350.51,-2638.86
  rectangle net GND: 19.69,-2527.56 222.44,-1791.34
  rectangle net GND: 1156.5,-2539.37 1358.27,-1791.34
  rectangle net GND: 19.69,-1988.19 1358.27,-1791.34
  region net GND: 1358.27,-2933.07 19.69,-2933.07 19.69,-3129.92 1358.27,-3129.92
  region net GND: 222.44,-2783.46 19.69,-2783.46 19.69,-3129.92 222.44,-3129.92
  region net GND: 1358.27,-2783.46 1161.42,-2783.46 1161.42,-3129.92 1358.27,-3129.92
Bottom Layer - PWR:
  pour cut-out: 858.27,-870.08 858.27,-677.17 554.13,-677.17 554.13,-881.89 870.08,-881.89
  pour cut-out: 870.67,-496.56 870.67,-338.58 507.87,-338.58 507.87,-496.56
Layer 1 - GND (plane layer: these items are gaps in the copper):
  pour cut-out: 873.03,-489.17 873.03,-317.91 507.87,-317.91 507.87,-489.17
  pour cut-out: 868.11,-879.92 868.11,-685.04 554.13,-685.04 554.13,-881.89 870.08,-881.89
Layer 2 - GND (plane layer: these items are gaps in the copper):
  pour cut-out: 868.11,-879.92 868.11,-685.04 554.13,-685.04 554.13,-881.89 870.08,-881.89
  pour cut-out: 873.03,-489.17 873.03,-317.91 507.87,-317.91 507.87,-489.17

## Silkscreen, mask and mechanical layers (free items; w line width, h text height)
Top Overlay:
  drawing of 134 lines, arcs and shapes, not listed
  text "FI" at 600.39,-160.98 h157.48
  text "OUT" at 185.04,-222.22 h78.74
  text "IN" at 1122.05,-222.22 h78.74
  text "MIXER" at 2047.24,-338.14 h157.48
  text "OUT" at 3807.09,-611.98 h78.74
  text "IF" at 2007.87,-789.15 h78.74
  text "RF" at 2854.33,-789.15 h78.74
  text "IN" at 4606.3,-797.02 h78.74
  text "LNA" at 4452.76,-999.56 h157.48
  text "LO" at 2135.83,-1143.48 h78.74
  text "MON" at 2096.46,-2039.15 h78.74
  text "VCO" at 255.91,-2109.79 h157.48
  text "PA" at 4433.07,-2310.58 h157.48
  text "IN" at 3787.4,-2399.39 h78.74
  text "IN" at 1998.03,-2403.32 h78.74
  text "OUT" at 2805.12,-2403.32 h78.74
  text "COUPLER" at 2411.42,-2808.61 h157.48
  text "OUT" at 4576.77,-2846.24 h78.74
  text "VTUNE" at 236.22,-2914.77 h78.74
  text "OUT" at 1043.31,-2915.13 h78.74
Bottom Overlay:
  drawing of 54 lines, arcs and shapes, not listed
Board Shape:
  the board outline again, w10
V Cut:
  lines w19.68: 0,-1769.69 4921.26,-1769.69 ; 3.94,-1375.98 4921.26,-1375.98 ; 1377.95,-3149.61 1377.95,0 ; 1771.65,-3149.61 1771.65,0 ; 3149.61,-3149.61 3149.61,0 ; 3543.31,-3149.61 3543.31,0
Dimensions:
  drawing of 217 lines, arcs and shapes, not listed
  text "Layer" at 6102.13,438.5 h60
  text "Name" at 6512.04,438.5 h60
  text "Material" at 7841.65,438.5 h60
  text "Thickness" at 8501.49,438.5 h60
  text "Constant" at 9151.32,438.5 h60
  text "Top Overlay" at 6512.04,318.5 h60
  text "Top Solder" at 6512.04,198.5 h60
  text "SM-001" at 7841.65,198.5 h60
  text "0,025mm" at 8501.49,198.5 h60
  text "4" at 9151.32,198.5 h60
  text "Top Surface Finish" at 6512.04,78.5 h60
  text "Lead-Free" at 7841.65,78.5 h60
  text "0,020mm" at 8501.49,78.5 h60
  text "1" at 6102.13,-41.5 h60
  text "Top Layer - RF" at 6512.04,-41.5 h60
  text "Copper" at 7841.65,-41.5 h60
  text "0,035mm" at 8501.49,-41.5 h60
  text "Prepeg 1" at 6512.04,-161.5 h60
  text "PP-006" at 7841.65,-161.5 h60
  text "0,210mm" at 8501.49,-161.5 h60
  text "4.4" at 9151.32,-161.5 h60
  text "2" at 6102.13,-281.5 h60
  text "Layer 1 - GND" at 6512.04,-281.5 h60
  text "CF-004" at 7841.65,-281.5 h60
  text "0,018mm" at 8501.49,-281.5 h60
  text "Dielectric 1" at 6512.04,-401.5 h60
  text "FR4" at 7841.65,-401.5 h60
  text "1,065mm" at 8501.49,-401.5 h60
  text "4.6" at 9151.32,-401.5 h60
  text "3" at 6102.13,-521.5 h60
  text "Layer 2 - GND" at 6512.04,-521.5 h60
  text "CF-004" at 7841.65,-521.5 h60
  text "0,018mm" at 8501.49,-521.5 h60
  text "Prepeg 2" at 6512.04,-641.5 h60
  text "PP-006" at 7841.65,-641.5 h60
  text "0,210mm" at 8501.49,-641.5 h60
  text "4.4" at 9151.32,-641.5 h60
  text "4" at 6102.13,-761.5 h60
  text "Bottom Layer - PWR" at 6512.04,-761.5 h60
  text "Copper" at 7841.65,-761.5 h60
  text "0,035mm" at 8501.49,-761.5 h60
  text "Bottom Surface Finish" at 6512.04,-881.5 h60
  text "Lead-Free" at 7841.65,-881.5 h60
  text "0,020mm" at 8501.49,-881.5 h60
  text "Bottom Solder" at 6512.04,-1001.5 h60
  text "SM-001" at 7841.65,-1001.5 h60
  text "0,025mm" at 8501.49,-1001.5 h60
  text "4" at 9151.32,-1001.5 h60
  text "Bottom Overlay" at 6512.04,-1121.5 h60

## Dimensions
4921.26,1.97 to 4921.26,-3147.64 on Mechanical 16
0,-3149.61 to 4921.26,-3149.61 on Mechanical 16

## Text inside footprints (layer, text, board x,y; h text height)
IF: Mechanical 13 "PCB EDGE" at 1787.95,-748.19 h24
IN_C: Mechanical 13 "PCB EDGE" at 1784.02,-2921.42 h24
IN_IF: Mechanical 13 "PCB EDGE" at 1361.65,-228.19 h24 r180
IN_LNA: Mechanical 13 "PCB EDGE" at 4901.02,-228.19 h24 r180
IN_PA: Mechanical 13 "PCB EDGE" at 3563.54,-2921.42 h24
OUT_C: Mechanical 13 "PCB EDGE" at 3133.31,-2401.42 h24 r180
OUT_F: Mechanical 13 "PCB EDGE" at 2200.63,-1784.02 h24 r270
OUT_IF: Mechanical 13 "PCB EDGE" at 20.24,-748.19 h24
OUT_LNA: Mechanical 13 "PCB EDGE" at 3555.67,-748.19 h24
OUT_PA: Mechanical 13 "PCB EDGE" at 4897.09,-2401.42 h24 r180
OUT_VCO: Mechanical 13 "PCB EDGE" at 1357.72,-2401.42 h24 r180
RF: Mechanical 13 "PCB EDGE" at 3133.31,-228.19 h24 r180
T1: Mechanical 13 "PCB EDGE" at 1830.87,-3137.24 h24 r90
T2: Mechanical 13 "PCB EDGE" at 3606.46,-3133.31 h24 r90
T4: Mechanical 13 "PCB EDGE" at 3086.46,-16.3 h24 r270
T5: Mechanical 13 "PCB EDGE" at 1314.8,-12.36 h24 r270
U1: Mechanical 13 "*" at 2672.85,-521.31 h50; Top Overlay "*" at 2590.55,-482.28 h35.43
U4: Mechanical 13 "*" at 2423.57,-2334.27 h50 r270; Top Overlay "*" at 2467.66,-2293.77 h35.43 r270
U6: Mechanical 13 "*" at 811.74,-833.85 h50 r180; Top Overlay "*" at 811.74,-833.85 h35.43 r180
VLO: Mechanical 13 "PCB EDGE" at 2720.63,-1357.72 h24 r90
Vtune: Mechanical 13 "PCB EDGE" at 16.3,-2921.42 h24